# EAGLE board bighexagon (EAGLE 6.0), part 1 of 2
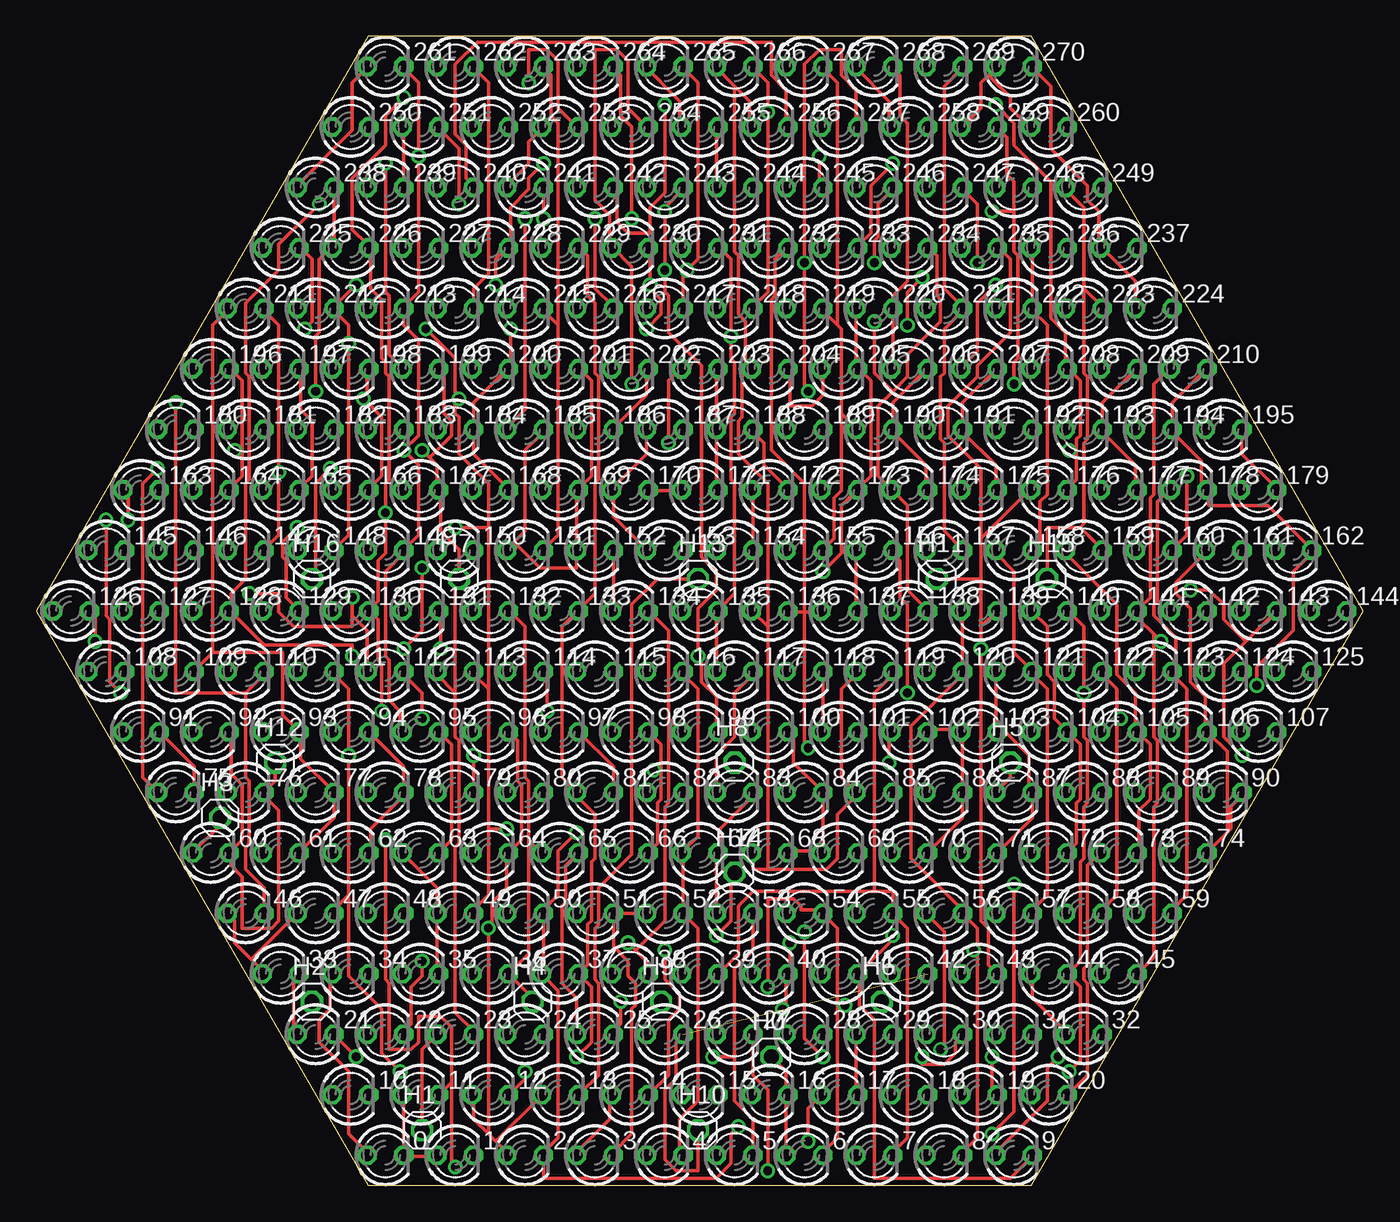
[diagram p0: board, top side]
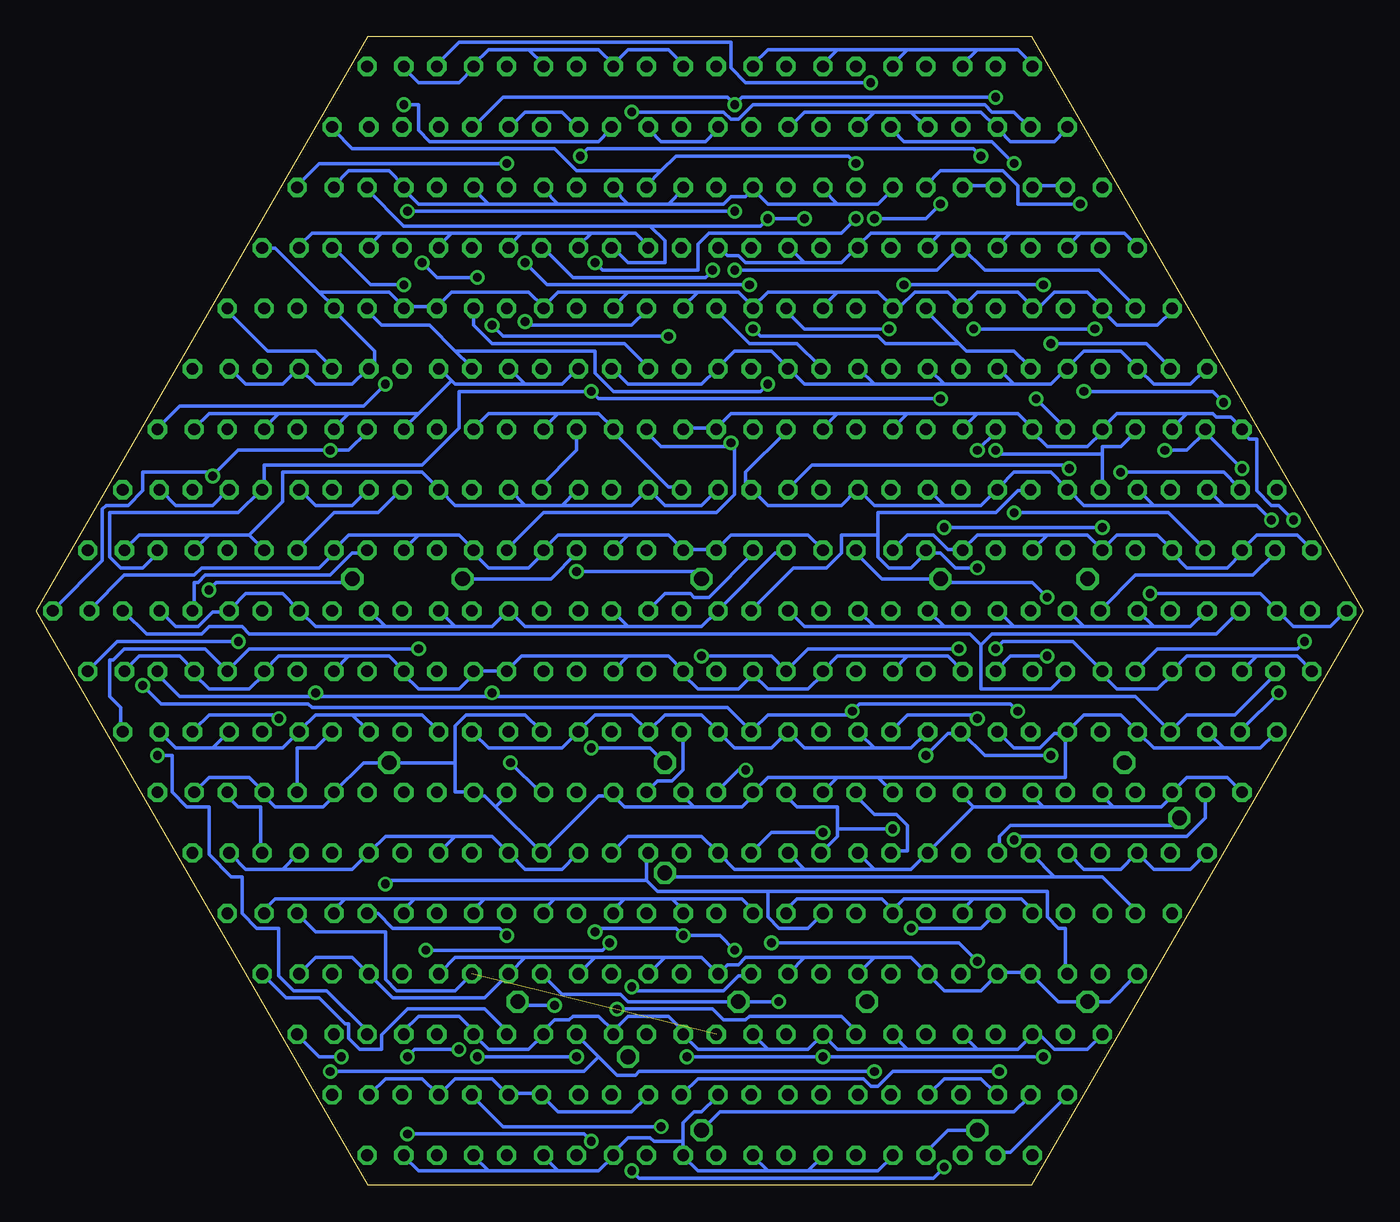
[diagram p1: board, bottom side, seen from below]

Size 91.69 x 79.41 mm. Coordinates in mm from the lower left corner, seen from the top.
Outline: 22.92,0 68.77,0 91.69,39.7 68.77,79.41 22.92,79.41 0,39.7 22.92,0
Copper layers (1*16): Top 0.035mm / dielectric 1.5mm / Bottom 0.035mm
Design rules: minimum track width 10mil, minimum drill 24mil, track to track 8mil, track to pad 8mil, pad to pad 8mil, via to via 8mil, smd to smd 8mil, copper to edge 10mil, drill to drill 8mil, minimum pad ring 10mil, minimum via ring 8mil, stop-mask expansion 4mil, vias tented up to drill 0mil, thermal gap 10mil

## Footprints (pad centres in the part's own frame; a part is rotated, then mirrored left to right if it is on the bottom)
LED3MM = drill 0.813 octagon: A -1.27,0; K 1.27,0
1X01 = drill 1.016 octagon: 1 0,0

## Placement (x,y rotation side)
0  [LED3MM]  24.13,2.09 0 top
1  [LED3MM]  28.96,2.09 0 top
2  [LED3MM]  33.78,2.09 0 top
3  [LED3MM]  38.61,2.09 0 top
4  [LED3MM]  43.43,2.09 0 top
5  [LED3MM]  48.26,2.09 0 top
6  [LED3MM]  53.09,2.09 0 top
7  [LED3MM]  57.91,2.09 0 top
8  [LED3MM]  62.74,2.09 0 top
9  [LED3MM]  67.56,2.09 0 top
10  [LED3MM]  21.72,6.27 0 top
11  [LED3MM]  26.54,6.27 0 top
12  [LED3MM]  31.37,6.27 0 top
13  [LED3MM]  36.2,6.27 0 top
14  [LED3MM]  41.02,6.27 0 top
15  [LED3MM]  45.85,6.27 0 top
16  [LED3MM]  50.67,6.27 0 top
17  [LED3MM]  55.5,6.27 0 top
18  [LED3MM]  60.33,6.27 0 top
19  [LED3MM]  65.15,6.27 0 top
20  [LED3MM]  69.98,6.27 0 top
21  [LED3MM]  19.3,10.45 0 top
22  [LED3MM]  24.13,10.45 0 top
23  [LED3MM]  28.96,10.45 0 top
24  [LED3MM]  33.78,10.45 0 top
25  [LED3MM]  38.61,10.45 0 top
26  [LED3MM]  43.43,10.45 0 top
27  [LED3MM]  48.26,10.45 0 top
28  [LED3MM]  53.09,10.45 0 top
29  [LED3MM]  57.91,10.45 0 top
30  [LED3MM]  62.74,10.45 0 top
31  [LED3MM]  67.56,10.45 0 top
32  [LED3MM]  72.39,10.45 0 top
33  [LED3MM]  16.89,14.63 0 top
34  [LED3MM]  21.72,14.63 0 top
35  [LED3MM]  26.54,14.63 0 top
36  [LED3MM]  31.37,14.63 0 top
37  [LED3MM]  36.2,14.63 0 top
38  [LED3MM]  41.02,14.63 0 top
39  [LED3MM]  45.85,14.63 0 top
40  [LED3MM]  50.67,14.63 0 top
41  [LED3MM]  55.5,14.63 0 top
42  [LED3MM]  60.33,14.63 0 top
43  [LED3MM]  65.15,14.63 0 top
44  [LED3MM]  69.98,14.63 0 top
45  [LED3MM]  74.8,14.63 0 top
46  [LED3MM]  14.48,18.81 0 top
47  [LED3MM]  19.3,18.81 0 top
48  [LED3MM]  24.13,18.81 0 top
49  [LED3MM]  28.96,18.81 0 top
50  [LED3MM]  33.78,18.81 0 top
51  [LED3MM]  38.61,18.81 0 top
52  [LED3MM]  43.43,18.81 0 top
53  [LED3MM]  48.26,18.81 0 top
54  [LED3MM]  53.09,18.81 0 top
55  [LED3MM]  57.91,18.81 0 top
56  [LED3MM]  62.74,18.81 0 top
57  [LED3MM]  67.56,18.81 0 top
58  [LED3MM]  72.39,18.81 0 top
59  [LED3MM]  77.22,18.81 0 top
60  [LED3MM]  12.06,22.99 0 top
61  [LED3MM]  16.89,22.99 0 top
62  [LED3MM]  21.72,22.99 0 top
63  [LED3MM]  26.54,22.99 0 top
64  [LED3MM]  31.37,22.99 0 top
65  [LED3MM]  36.2,22.99 0 top
66  [LED3MM]  41.02,22.99 0 top
67  [LED3MM]  45.85,22.99 0 top
68  [LED3MM]  50.67,22.99 0 top
69  [LED3MM]  55.5,22.99 0 top
70  [LED3MM]  60.33,22.99 0 top
71  [LED3MM]  65.15,22.99 0 top
72  [LED3MM]  69.98,22.99 0 top
73  [LED3MM]  74.8,22.99 0 top
74  [LED3MM]  79.63,22.99 0 top
75  [LED3MM]  9.65,27.17 0 top
76  [LED3MM]  14.48,27.17 0 top
77  [LED3MM]  19.3,27.17 0 top
78  [LED3MM]  24.13,27.17 0 top
79  [LED3MM]  28.96,27.17 0 top
80  [LED3MM]  33.78,27.17 0 top
81  [LED3MM]  38.61,27.17 0 top
82  [LED3MM]  43.43,27.17 0 top
83  [LED3MM]  48.26,27.17 0 top
84  [LED3MM]  53.09,27.17 0 top
85  [LED3MM]  57.91,27.17 0 top
86  [LED3MM]  62.74,27.17 0 top
87  [LED3MM]  67.56,27.17 0 top
88  [LED3MM]  72.39,27.17 0 top
89  [LED3MM]  77.22,27.17 0 top
90  [LED3MM]  82.04,27.17 0 top
91  [LED3MM]  7.24,31.35 0 top
92  [LED3MM]  12.06,31.35 0 top
93  [LED3MM]  16.89,31.35 0 top
94  [LED3MM]  21.72,31.35 0 top
95  [LED3MM]  26.54,31.35 0 top
96  [LED3MM]  31.37,31.35 0 top
97  [LED3MM]  36.2,31.35 0 top
98  [LED3MM]  41.02,31.35 0 top
99  [LED3MM]  45.85,31.35 0 top
100  [LED3MM]  50.67,31.35 0 top
101  [LED3MM]  55.5,31.35 0 top
102  [LED3MM]  60.33,31.35 0 top
103  [LED3MM]  65.15,31.35 0 top
104  [LED3MM]  69.98,31.35 0 top
105  [LED3MM]  74.8,31.35 0 top
106  [LED3MM]  79.63,31.35 0 top
107  [LED3MM]  84.45,31.35 0 top
108  [LED3MM]  4.83,35.53 0 top
109  [LED3MM]  9.65,35.53 0 top
110  [LED3MM]  14.48,35.53 0 top
111  [LED3MM]  19.3,35.53 0 top
112  [LED3MM]  24.13,35.53 0 top
113  [LED3MM]  28.96,35.53 0 top
114  [LED3MM]  33.78,35.53 0 top
115  [LED3MM]  38.61,35.53 0 top
116  [LED3MM]  43.43,35.53 0 top
117  [LED3MM]  48.26,35.53 0 top
118  [LED3MM]  53.09,35.53 0 top
119  [LED3MM]  57.91,35.53 0 top
120  [LED3MM]  62.74,35.53 0 top
121  [LED3MM]  67.56,35.53 0 top
122  [LED3MM]  72.39,35.53 0 top
123  [LED3MM]  77.22,35.53 0 top
124  [LED3MM]  82.04,35.53 0 top
125  [LED3MM]  86.87,35.53 0 top
126  [LED3MM]  2.41,39.7 0 top
127  [LED3MM]  7.24,39.7 0 top
128  [LED3MM]  12.06,39.7 0 top
129  [LED3MM]  16.89,39.7 0 top
130  [LED3MM]  21.72,39.7 0 top
131  [LED3MM]  26.54,39.7 0 top
132  [LED3MM]  31.37,39.7 0 top
133  [LED3MM]  36.2,39.7 0 top
134  [LED3MM]  41.02,39.7 0 top
135  [LED3MM]  45.85,39.7 0 top
136  [LED3MM]  50.67,39.7 0 top
137  [LED3MM]  55.5,39.7 0 top
138  [LED3MM]  60.33,39.7 0 top
139  [LED3MM]  65.15,39.7 0 top
140  [LED3MM]  69.98,39.7 0 top
141  [LED3MM]  74.8,39.7 0 top
142  [LED3MM]  79.63,39.7 0 top
143  [LED3MM]  84.45,39.7 0 top
144  [LED3MM]  89.28,39.7 0 top
145  [LED3MM]  4.83,43.88 0 top
146  [LED3MM]  9.65,43.88 0 top
147  [LED3MM]  14.48,43.88 0 top
148  [LED3MM]  19.3,43.88 0 top
149  [LED3MM]  24.13,43.88 0 top
150  [LED3MM]  28.96,43.88 0 top
151  [LED3MM]  33.78,43.88 0 top
152  [LED3MM]  38.61,43.88 0 top
153  [LED3MM]  43.43,43.88 0 top
154  [LED3MM]  48.26,43.88 0 top
155  [LED3MM]  53.09,43.88 0 top
156  [LED3MM]  57.91,43.88 0 top
157  [LED3MM]  62.74,43.88 0 top
158  [LED3MM]  67.56,43.88 0 top
159  [LED3MM]  72.39,43.88 0 top
160  [LED3MM]  77.22,43.88 0 top
161  [LED3MM]  82.04,43.88 0 top
162  [LED3MM]  86.87,43.88 0 top
163  [LED3MM]  7.24,48.06 0 top
164  [LED3MM]  12.06,48.06 0 top
165  [LED3MM]  16.89,48.06 0 top
166  [LED3MM]  21.72,48.06 0 top
167  [LED3MM]  26.54,48.06 0 top
168  [LED3MM]  31.37,48.06 0 top
169  [LED3MM]  36.2,48.06 0 top
170  [LED3MM]  41.02,48.06 0 top
171  [LED3MM]  45.85,48.06 0 top
172  [LED3MM]  50.67,48.06 0 top
173  [LED3MM]  55.5,48.06 0 top
174  [LED3MM]  60.33,48.06 0 top
175  [LED3MM]  65.15,48.06 0 top
176  [LED3MM]  69.98,48.06 0 top
177  [LED3MM]  74.8,48.06 0 top
178  [LED3MM]  79.63,48.06 0 top
179  [LED3MM]  84.45,48.06 0 top
180  [LED3MM]  9.65,52.24 0 top
181  [LED3MM]  14.48,52.24 0 top
182  [LED3MM]  19.3,52.24 0 top
183  [LED3MM]  24.13,52.24 0 top
184  [LED3MM]  28.96,52.24 0 top
185  [LED3MM]  33.78,52.24 0 top
186  [LED3MM]  38.61,52.24 0 top
187  [LED3MM]  43.43,52.24 0 top
188  [LED3MM]  48.26,52.24 0 top
189  [LED3MM]  53.09,52.24 0 top
190  [LED3MM]  57.91,52.24 0 top
191  [LED3MM]  62.74,52.24 0 top
192  [LED3MM]  67.56,52.24 0 top
193  [LED3MM]  72.39,52.24 0 top
194  [LED3MM]  77.22,52.24 0 top
195  [LED3MM]  82.04,52.24 0 top
196  [LED3MM]  12.06,56.42 0 top
197  [LED3MM]  16.89,56.42 0 top
198  [LED3MM]  21.72,56.42 0 top
199  [LED3MM]  26.54,56.42 0 top
200  [LED3MM]  31.37,56.42 0 top
201  [LED3MM]  36.2,56.42 0 top
202  [LED3MM]  41.02,56.42 0 top
203  [LED3MM]  45.85,56.42 0 top
204  [LED3MM]  50.67,56.42 0 top
205  [LED3MM]  55.5,56.42 0 top
206  [LED3MM]  60.33,56.42 0 top
207  [LED3MM]  65.15,56.42 0 top
208  [LED3MM]  69.98,56.42 0 top
209  [LED3MM]  74.8,56.42 0 top
210  [LED3MM]  79.63,56.42 0 top
211  [LED3MM]  14.48,60.6 0 top
212  [LED3MM]  19.3,60.6 0 top
213  [LED3MM]  24.13,60.6 0 top
214  [LED3MM]  28.96,60.6 0 top
215  [LED3MM]  33.78,60.6 0 top
216  [LED3MM]  38.61,60.6 0 top
217  [LED3MM]  43.43,60.6 0 top
218  [LED3MM]  48.26,60.6 0 top
219  [LED3MM]  53.09,60.6 0 top
220  [LED3MM]  57.91,60.6 0 top
221  [LED3MM]  62.74,60.6 0 top
222  [LED3MM]  67.56,60.6 0 top
223  [LED3MM]  72.39,60.6 0 top
224  [LED3MM]  77.22,60.6 0 top
225  [LED3MM]  16.89,64.78 0 top
226  [LED3MM]  21.72,64.78 0 top
227  [LED3MM]  26.54,64.78 0 top
228  [LED3MM]  31.37,64.78 0 top
229  [LED3MM]  36.2,64.78 0 top
230  [LED3MM]  41.02,64.78 0 top
231  [LED3MM]  45.85,64.78 0 top
232  [LED3MM]  50.67,64.78 0 top
233  [LED3MM]  55.5,64.78 0 top
234  [LED3MM]  60.33,64.78 0 top
235  [LED3MM]  65.15,64.78 0 top
236  [LED3MM]  69.98,64.78 0 top
237  [LED3MM]  74.8,64.78 0 top
238  [LED3MM]  19.3,68.96 0 top
239  [LED3MM]  24.13,68.96 0 top
240  [LED3MM]  28.96,68.96 0 top
241  [LED3MM]  33.78,68.96 0 top
242  [LED3MM]  38.61,68.96 0 top
243  [LED3MM]  43.43,68.96 0 top
244  [LED3MM]  48.26,68.96 0 top
245  [LED3MM]  53.09,68.96 0 top
246  [LED3MM]  57.91,68.96 0 top
247  [LED3MM]  62.74,68.96 0 top
248  [LED3MM]  67.56,68.96 0 top
249  [LED3MM]  72.39,68.96 0 top
250  [LED3MM]  21.72,73.14 0 top
251  [LED3MM]  26.54,73.14 0 top
252  [LED3MM]  31.37,73.14 0 top
253  [LED3MM]  36.2,73.14 0 top
254  [LED3MM]  41.02,73.14 0 top
255  [LED3MM]  45.85,73.14 0 top
256  [LED3MM]  50.67,73.14 0 top
257  [LED3MM]  55.5,73.14 0 top
258  [LED3MM]  60.33,73.14 0 top
259  [LED3MM]  65.15,73.14 0 top
260  [LED3MM]  69.98,73.14 0 top
261  [LED3MM]  24.13,77.32 0 top
262  [LED3MM]  28.96,77.32 0 top
263  [LED3MM]  33.78,77.32 0 top
264  [LED3MM]  38.61,77.32 0 top
265  [LED3MM]  43.43,77.32 0 top
266  [LED3MM]  48.26,77.32 0 top
267  [LED3MM]  53.09,77.32 0 top
268  [LED3MM]  57.91,77.32 0 top
269  [LED3MM]  62.74,77.32 0 top
270  [LED3MM]  67.56,77.32 0 top
H0  [1X01]  50.8,8.89 0 top
H1  [1X01]  26.67,3.81 0 top
H2  [1X01]  19.05,12.7 0 top
H3  [1X01]  12.7,25.4 0 top
H4  [1X01]  34.29,12.7 0 top
H5  [1X01]  67.31,29.21 0 top
H6  [1X01]  58.42,12.7 0 top
H7  [1X01]  29.21,41.91 0 top
H8  [1X01]  48.26,29.21 0 top
H9  [1X01]  43.18,12.7 0 top
H10  [1X01]  45.72,3.81 0 top
H11  [1X01]  62.23,41.91 0 top
H12  [1X01]  16.51,29.21 0 top
H13  [1X01]  45.72,41.91 0 top
H14  [1X01]  48.26,21.59 0 top
H15  [1X01]  69.85,41.91 0 top
H16  [1X01]  19.05,41.91 0 top

## Library data of the parts
0 1-270 = led
H0 H1-H16 = pinhead

## Nets
S0: 0.K 1.A 2.A 3.A 4.A 5.A 6.A 7.A 8.A 9.A 10.A 11.A 12.A 13.A 14.A 15.A 16.K 32.K 48.K 64.K 80.K 96.K 112.K 128.K 144.K 160.K 176.K 192.K 208.K 224.K 240.K 256.K H0.1
S1: 1.K 16.A 17.K 18.A 19.A 20.A 21.A 22.A 23.A 24.A 25.A 26.A 27.A 28.A 29.A 30.A 31.A 33.K 49.K 65.K 81.K 97.K 113.K 129.K 145.K 161.K 177.K 193.K 209.K 225.K 241.K 257.K H1.1
S2: 2.K 18.K 32.A 33.A 34.K 35.A 36.A 37.A 38.A 39.A 40.A 41.A 42.A 43.A 44.A 45.A 46.A 47.A 50.K 66.K 82.K 98.K 114.K 130.K 146.K 162.K 178.K 194.K 210.K 226.K 242.K 258.K H2.1
S3: 3.K 19.K 35.K 48.A 49.A 50.A 51.K 52.A 53.A 54.A 55.A 56.A 57.A 58.A 59.A 60.A 61.A 62.A 63.A 67.K 83.K 99.K 115.K 131.K 147.K 163.K 179.K 195.K 211.K 227.K 243.K 259.K H3.1
S4: 4.K 20.K 36.K 52.K 64.A 65.A 66.A 67.A 68.K 69.A 70.A 71.A 72.A 73.A 74.A 75.A 76.A 77.A 78.A 79.A 84.K 100.K 116.K 132.K 148.K 164.K 180.K 196.K 212.K 228.K 244.K 260.K H4.1
S5: 5.K 21.K 37.K 53.K 69.K 80.A 81.A 82.A 83.A 84.A 85.K 86.A 87.A 88.A 89.A 90.A 91.A 92.A 93.A 94.A 95.A 101.K 117.K 133.K 149.K 165.K 181.K 197.K 213.K 229.K 245.K 261.K H5.1
S6: 6.K 22.K 38.K 54.K 70.K 86.K 96.A 97.A 98.A 99.A 100.A 101.A 102.K 103.A 104.A 105.A 106.A 107.A 108.A 109.A 110.A 111.A 118.K 134.K 150.K 166.K 182.K 198.K 214.K 230.K 246.K 262.K H6.1
S7: 7.K 23.K 39.K 55.K 71.K 87.K 103.K 112.A 113.A 114.A 115.A 116.A 117.A 118.A 119.K 120.A 121.A 122.A 123.A 124.A 125.A 126.A 127.A 135.K 151.K 167.K 183.K 199.K 215.K 231.K 247.K 263.K H7.1
S8: 8.K 24.K 40.K 56.K 72.K 88.K 104.K 120.K 128.A 129.A 130.A 131.A 132.A 133.A 134.A 135.A 136.K 137.A 138.A 139.A 140.A 141.A 142.A 143.A 152.K 168.K 184.K 200.K 216.K 232.K 248.K 264.K H8.1
S9: 9.K 25.K 41.K 57.K 73.K 89.K 105.K 121.K 137.K 144.A 145.A 146.A 147.A 148.A 149.A 150.A 151.A 152.A 153.K 154.A 155.A 156.A 157.A 158.A 159.A 169.K 185.K 201.K 217.K 233.K 249.K 265.K H9.1
S10: 10.K 26.K 42.K 58.K 74.K 90.K 106.K 122.K 138.K 154.K 160.A 161.A 162.A 163.A 164.A 165.A 166.A 167.A 168.A 169.A 170.K 171.A 172.A 173.A 174.A 175.A 186.K 202.K 218.K 234.K 250.K 266.K H10.1
S11: 11.K 27.K 43.K 59.K 75.K 91.K 107.K 123.K 139.K 155.K 171.K 176.A 177.A 178.A 179.A 180.A 181.A 182.A 183.A 184.A 185.A 186.A 187.K 188.A 189.A 190.A 191.A 203.K 219.K 235.K 251.K 267.K H11.1
S12: 12.K 28.K 44.K 60.K 76.K 92.K 108.K 124.K 140.K 156.K 172.K 188.K 192.A 193.A 194.A 195.A 196.A 197.A 198.A 199.A 200.A 201.A 202.A 203.A 204.K 205.A 206.A 207.A 220.K 236.K 252.K 268.K H12.1
S13: 13.K 29.K 45.K 61.K 77.K 93.K 109.K 125.K 141.K 157.K 173.K 189.K 205.K 208.A 209.A 210.A 211.A 212.A 213.A 214.A 215.A 216.A 217.A 218.A 219.A 220.A 221.K 222.A 223.A 237.K 253.K 269.K H13.1
S14: 14.K 30.K 46.K 62.K 78.K 94.K 110.K 126.K 142.K 158.K 174.K 190.K 206.K 222.K 224.A 225.A 226.A 227.A 228.A 229.A 230.A 231.A 232.A 233.A 234.A 235.A 236.A 237.A 238.K 239.A 254.K 270.K H14.1
S15: 15.K 31.K 47.K 63.K 79.K 95.K 111.K 127.K 143.K 159.K 175.K 191.K 207.K 223.K 239.K 240.A 241.A 242.A 243.A 244.A 245.A 246.A 247.A 248.A 249.A 250.A 251.A 252.A 253.A 254.A 255.K H15.1
S16: 0.A 17.A 34.A 51.A 68.A 85.A 102.A 119.A 136.A 153.A 170.A 187.A 204.A 221.A 238.A 255.A 256.A 257.A 258.A 259.A 260.A 261.A 262.A 263.A 264.A 265.A 266.A 267.A 268.A 269.A 270.A H16.1